# EAGLE board Low.Noise.Current.Source (EAGLE 7.2.0)
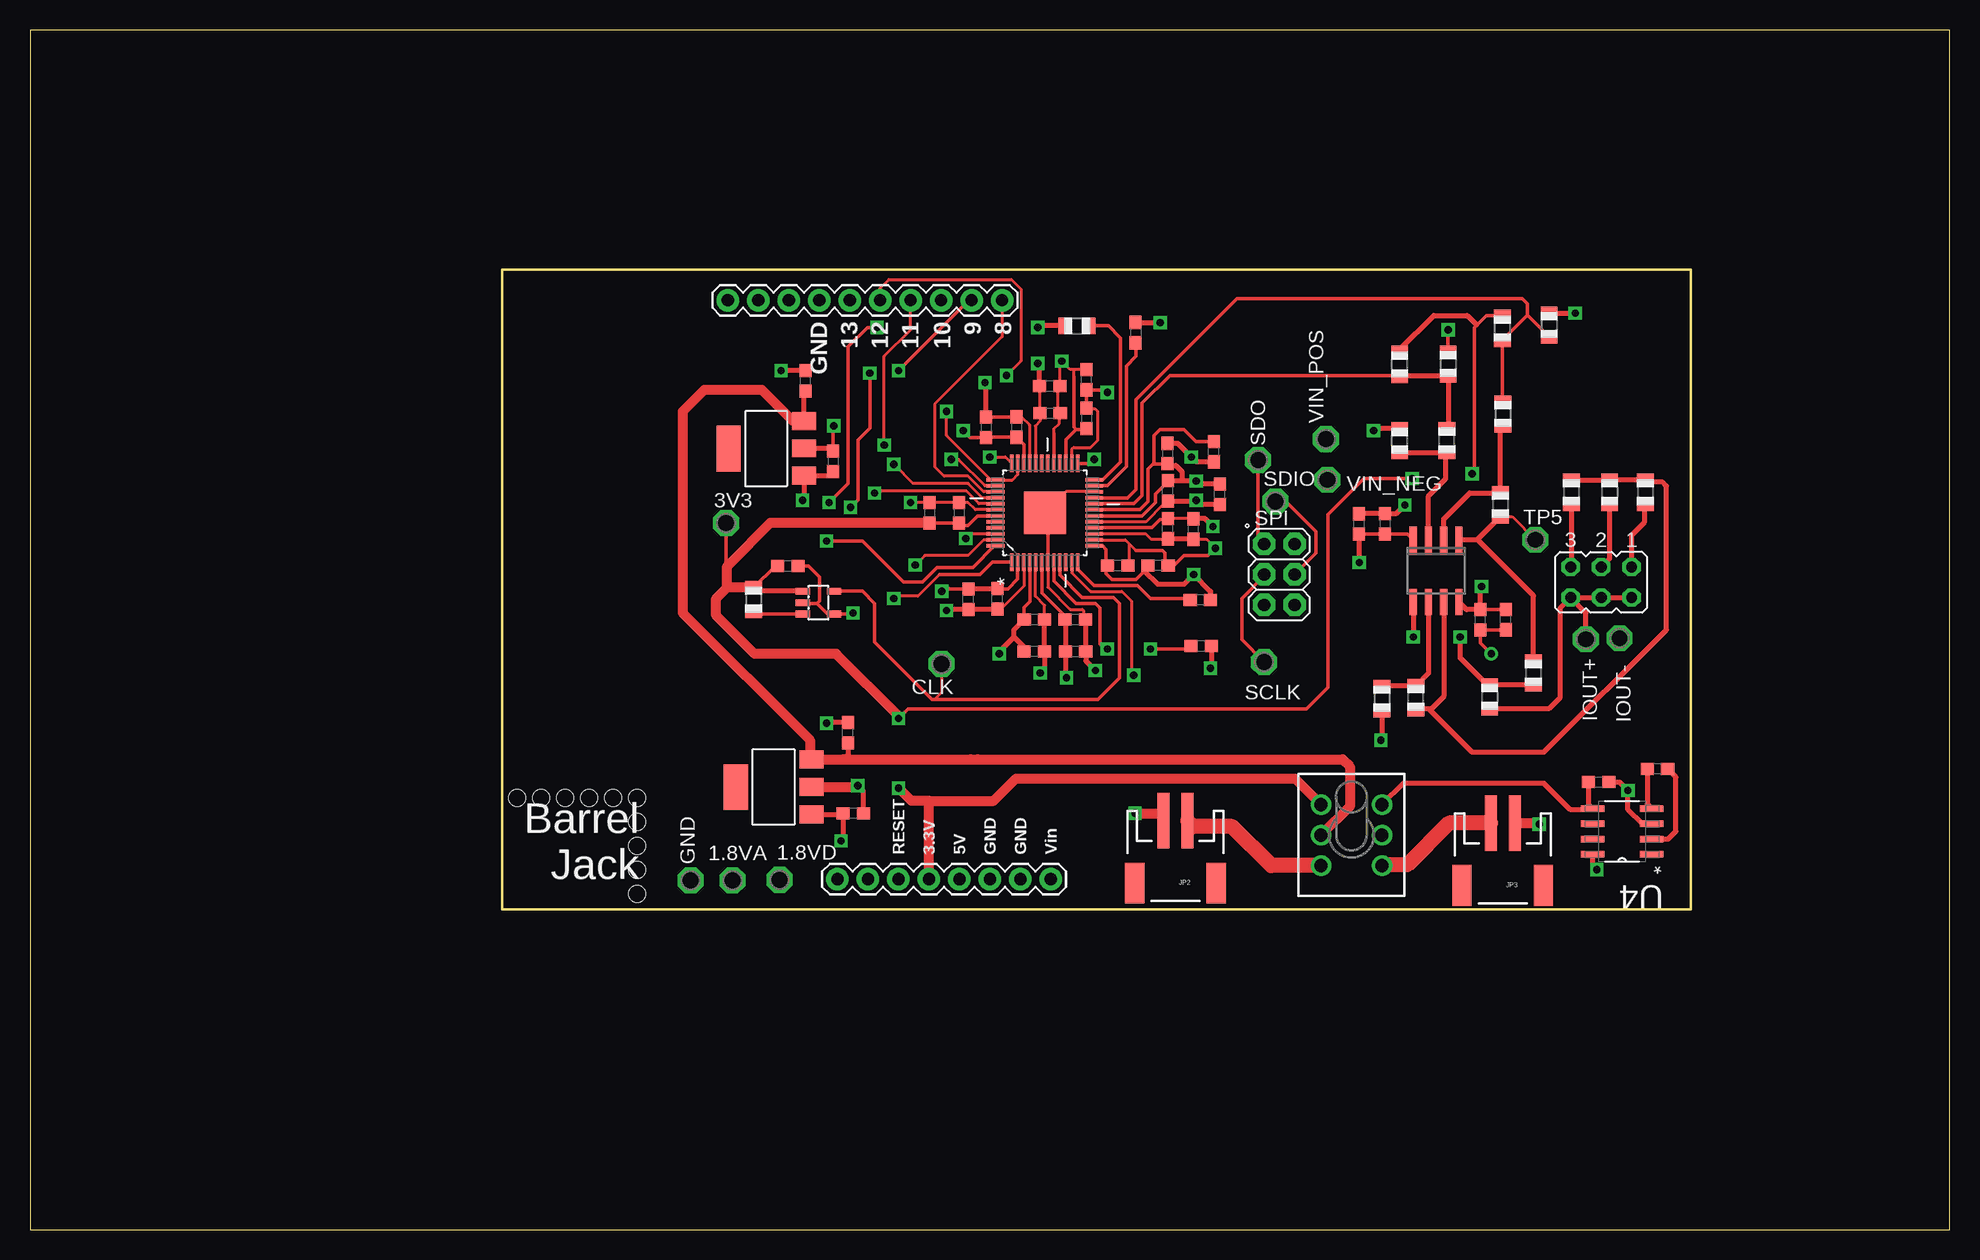
[diagram p0: board, top side]
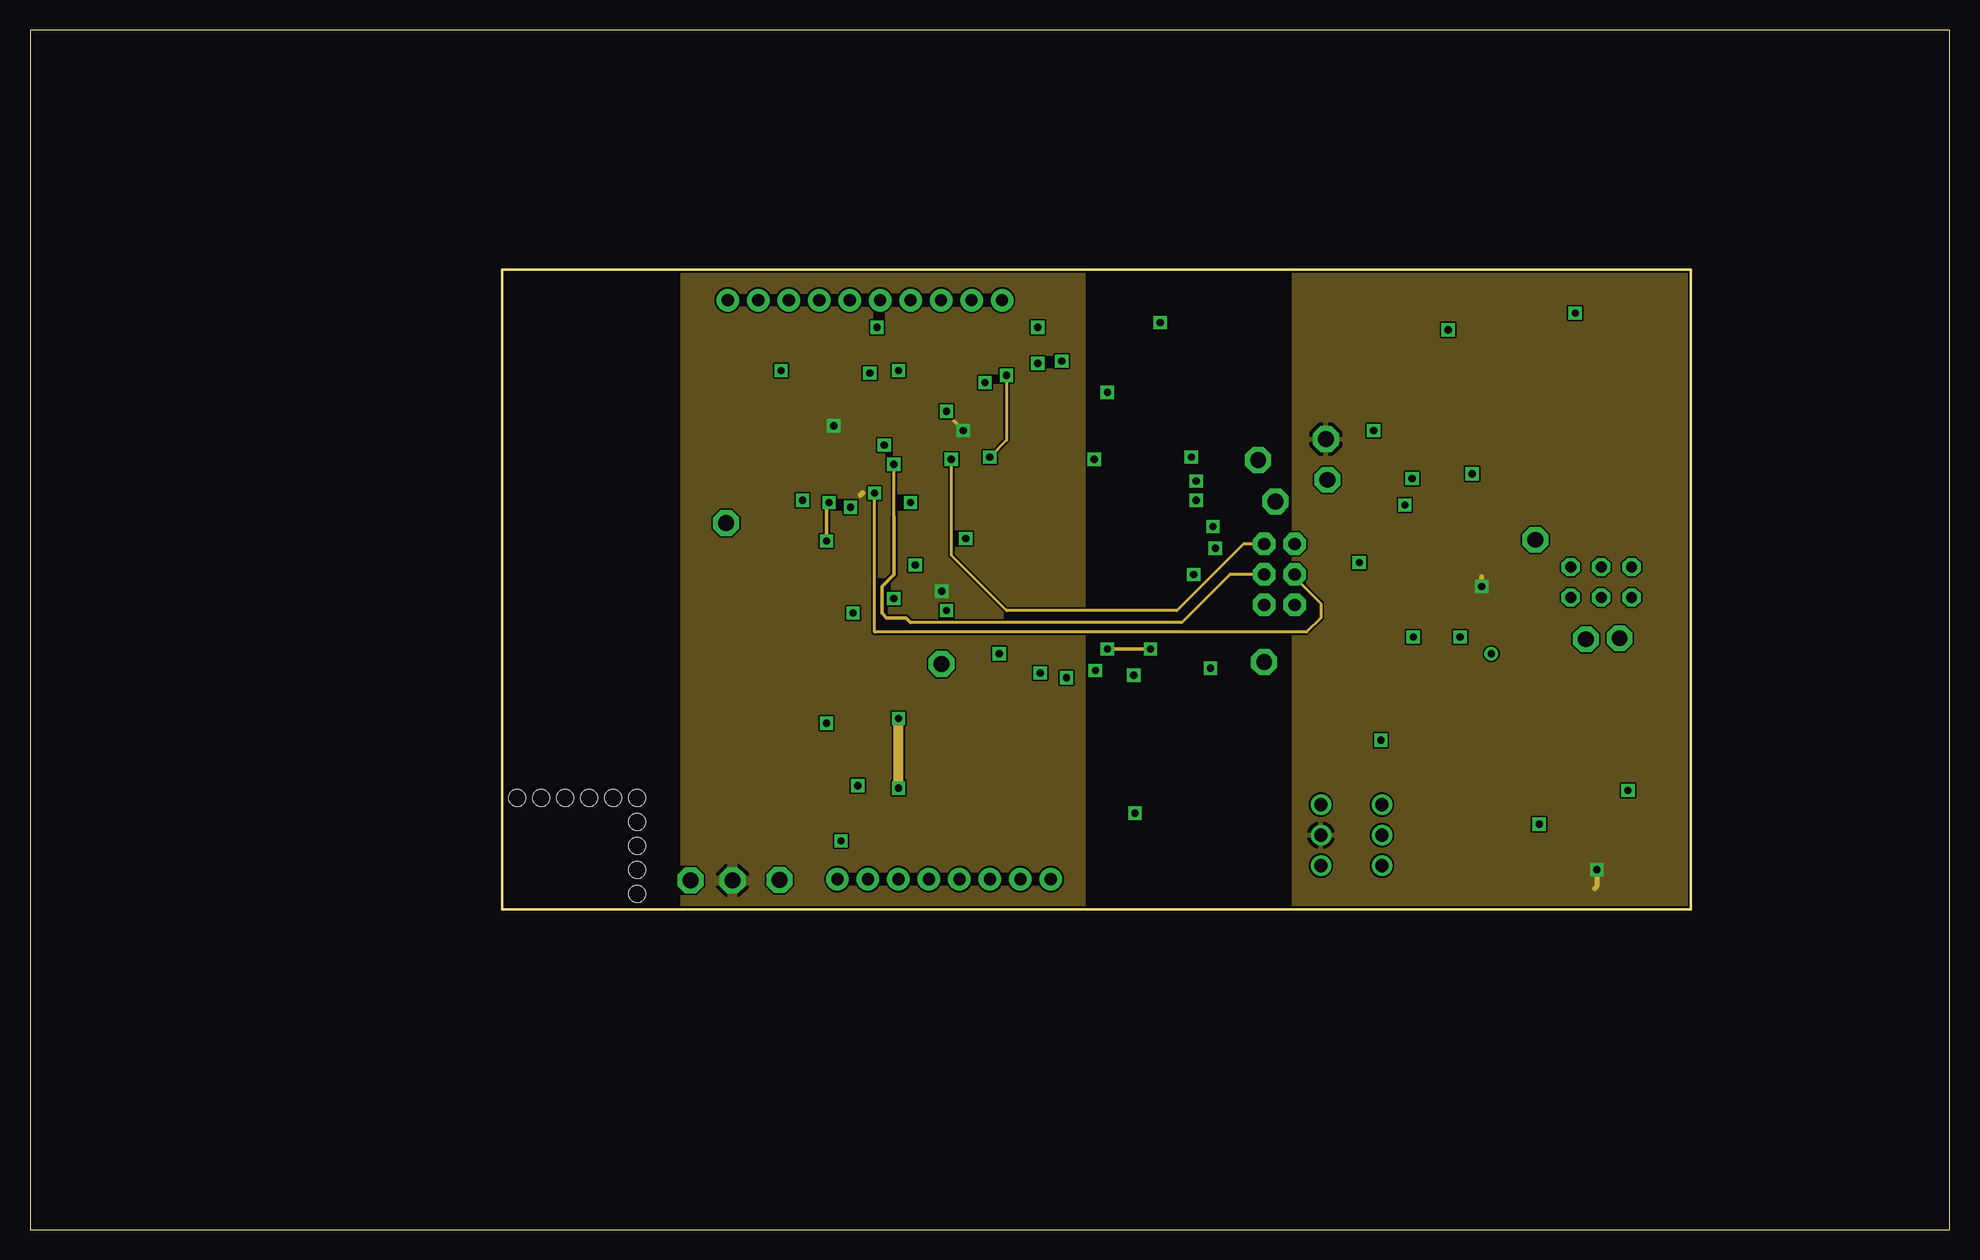
[diagram p1: board, inner layer VDD]
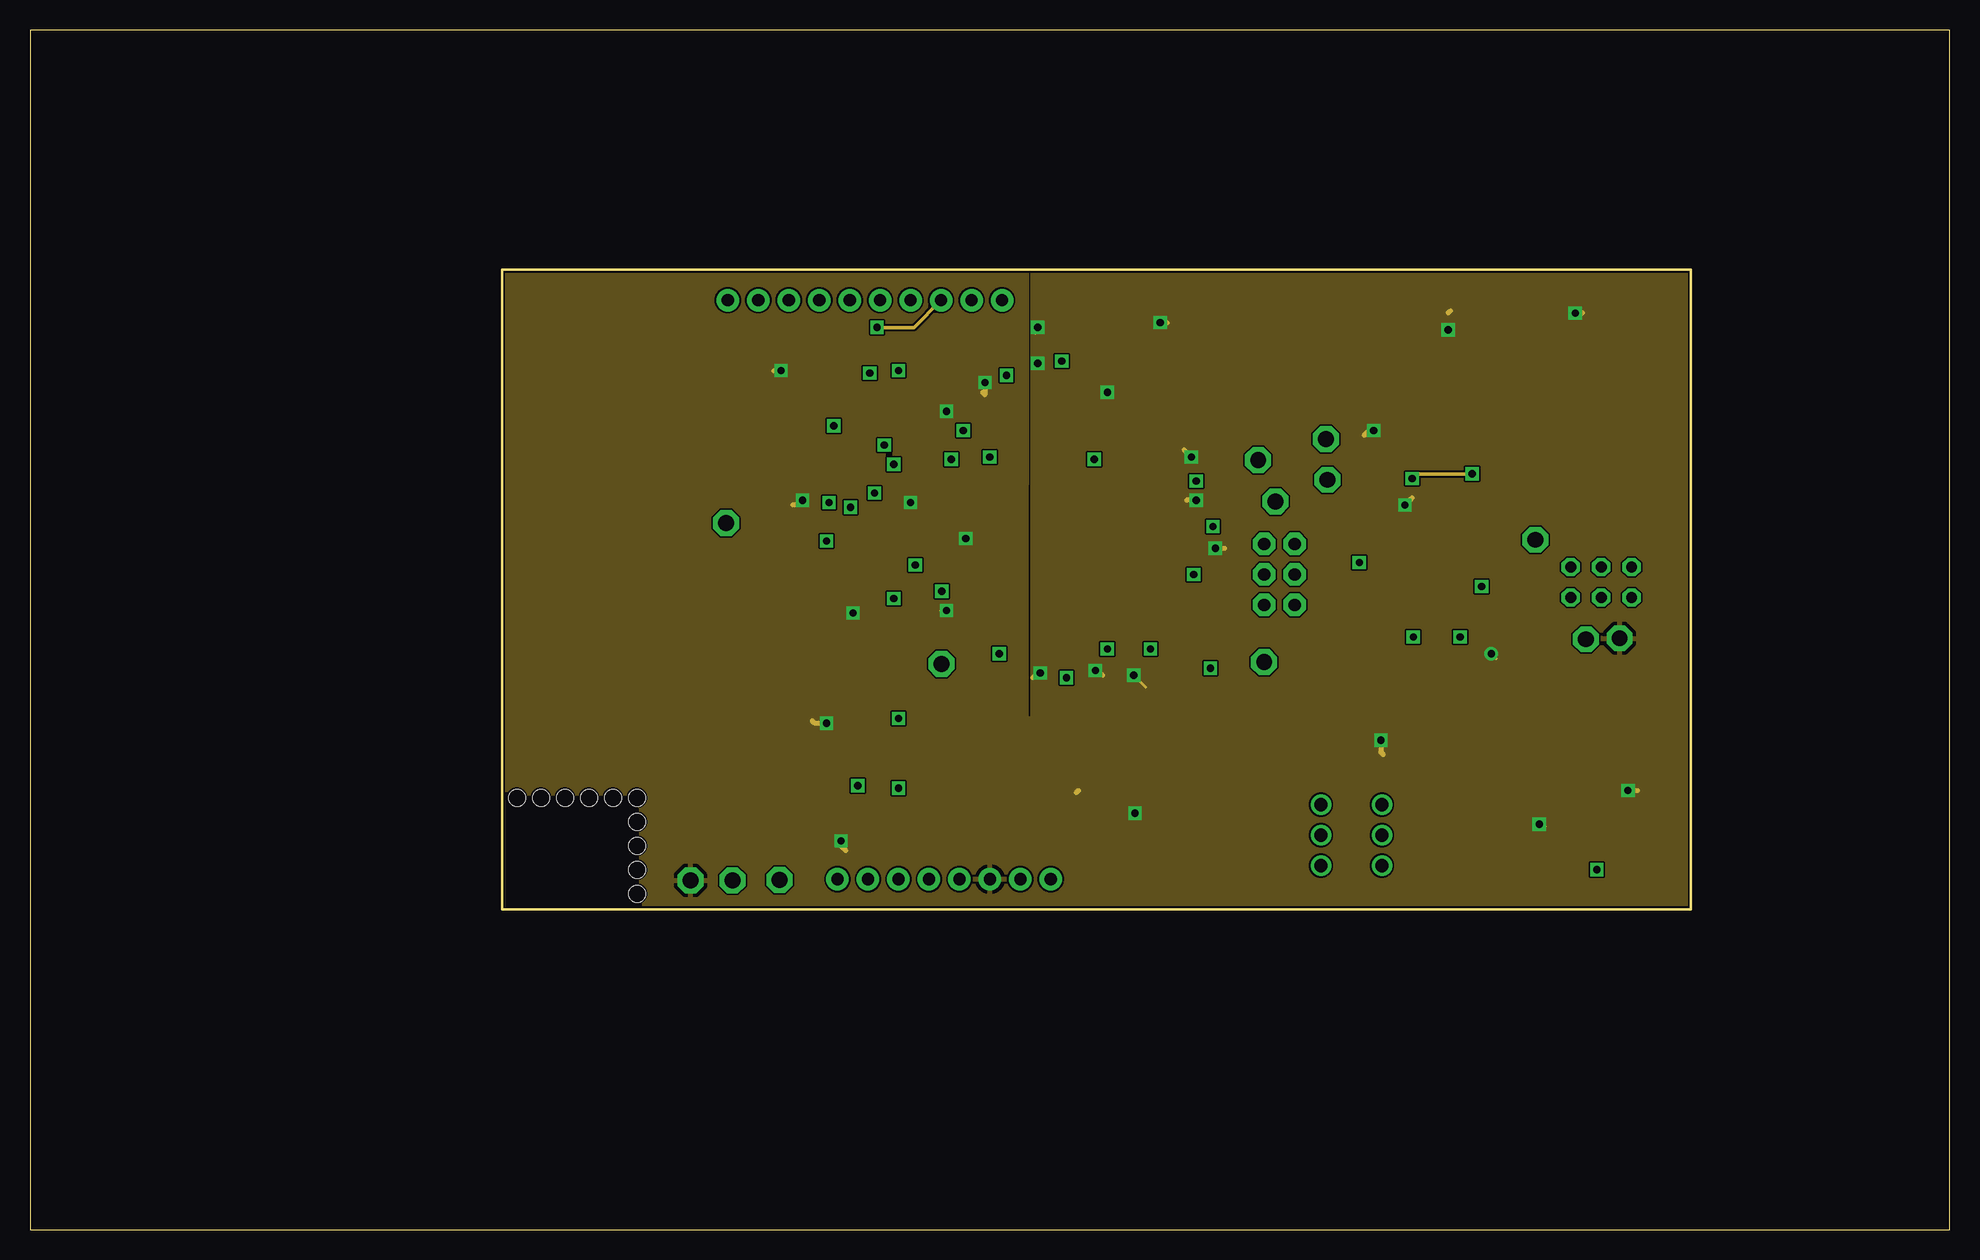
[diagram p2: board, inner layer GND]
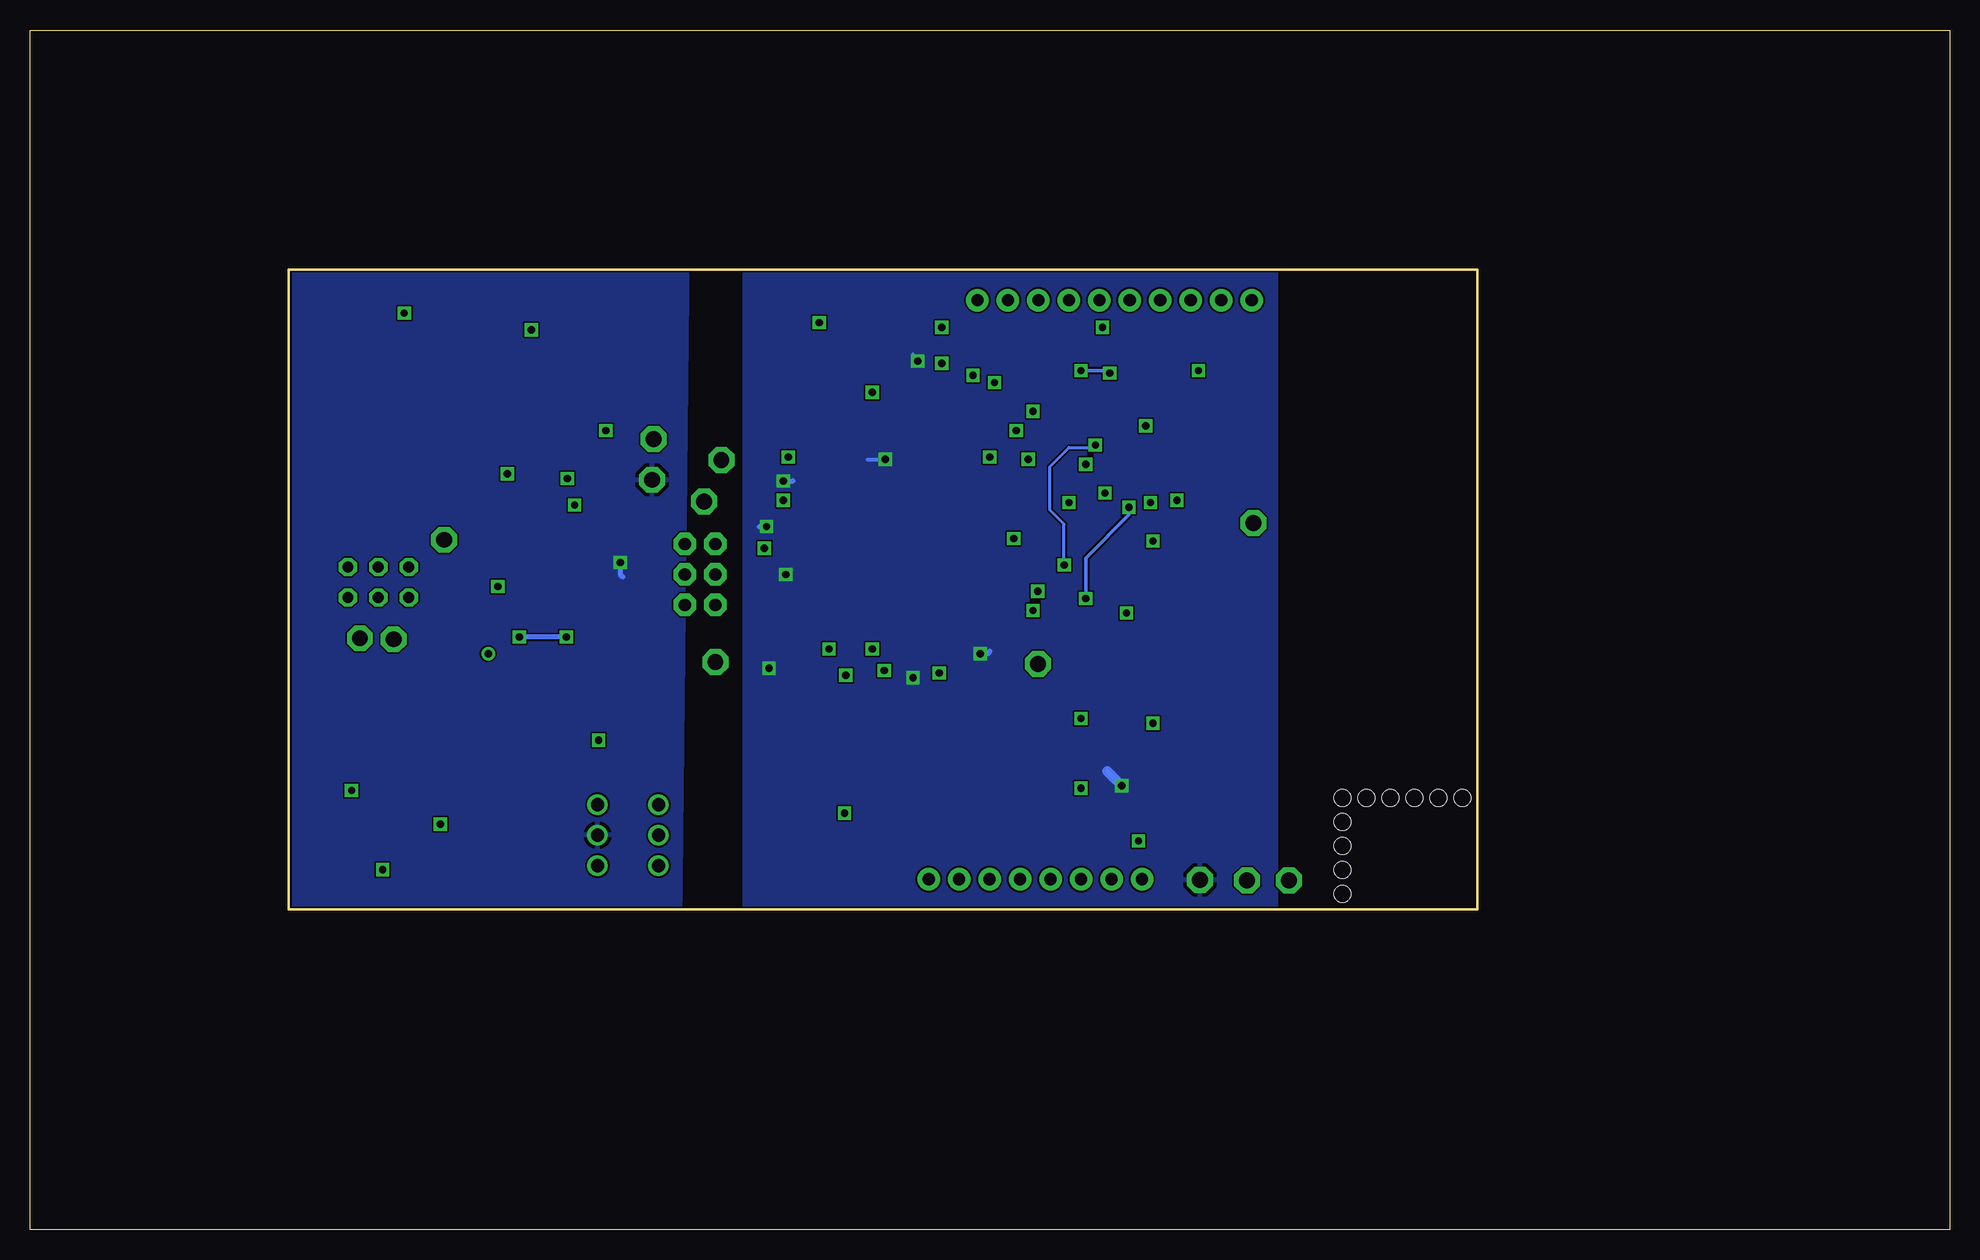
[diagram p3: board, bottom side, seen from below]

Size 160 x 100 mm. Coordinates in mm from the lower left corner, seen from the top.
Outline: 0,0 160,0 160,100 0,100 0,0
Copper layers (1*2*15*16): Top 0.035mm / dielectric 1.5mm / VDD 0.035mm / dielectric 0.15mm / GND 0.035mm / dielectric 0.2mm / Bottom 0.035mm
Design rules "SparkFun-4-layer": minimum track width 6mil, minimum drill 13mil, track to track 6mil, track to pad 6mil, pad to pad 6mil, via to via 6mil, smd to smd 6mil, copper to edge 6mil, drill to drill 8mil, minimum pad ring 12mil, minimum via ring 10mil, stop-mask expansion 4mil, vias tented up to drill 20mil, thermal gap 12mil
Holes 1.4 mm at 40.6,36 42.6,36 44.6,36 46.6,36 48.6,36 50.6,36 50.6,34 50.6,32 50.6,30 50.6,28

## Footprints (pad centres in the part's own frame; a part is rotated, then mirrored left to right if it is on the bottom)
P1-13 = drill 1.321 pad 2.159 octagon: TP 0,0
C0603 = smd 1.1 x 1: 1 -0.85,0; 2 0.85,0
SOT223 = smd 1.499 x 2.007: 1 -2.261,-3.15; 2 0.025,-3.15; 3 2.311,-3.15 | smd 3.81 x 2.007: 4 0,3.15
JP3Q = drill 0.914 octagon: 1 -2.54,-1.27; 2 -2.54,1.27; 3 0,-1.27; 4 0,1.27; 5 2.54,-1.27; 6 2.54,1.27
JST-2-SMD = smd 1 x 4.6: 1 -1,-3.7; 2 1,-3.7 | smd 1.6 x 3.4: NC1 -3.4,1.5; NC2 3.4,1.5
SO8 = smd 0.6 x 2.2: 1 -1.905,-2.6; 2 -0.635,-2.6; 3 0.635,-2.6; 4 1.905,-2.6; 5 1.905,2.6; 6 0.635,2.6; 7 -0.635,2.6; 8 -1.905,2.6
ARDUINO_DUE = drill 1.016 pad 1.88: 3.3V 35.56,2.54; 5V 38.1,2.54; 8 41.656,50.8; 9 39.116,50.8; 10 36.576,50.8; 11 34.036,50.8; 12 31.496,50.8; 13 28.956,50.8; AREF 23.876,50.8; GND 26.416,50.8; GND. 43.18,2.54; GND.. 40.64,2.54; I/OREF 30.48,2.54; N/C 27.94,2.54; RESET 33.02,2.54; SCL1 18.796,50.8; SDA1 21.336,50.8; VIN 45.72,2.54 | drill 1.016 pad 1.88 octagon: +5V_ 66.04,30.48; GND__ 66.04,25.4; MISO 63.5,30.48; MOSI 66.04,27.94; RESET. 63.5,25.4; SCK 63.5,27.94
R0805 = smd 1.1 x 1.4: 1 -1,0; 2 1,0
TL4XPO = drill 1.1 pad 1.676: 1 -2.54,2.54; 2 0,2.54; 3 2.54,2.54; 4 -2.54,-2.54; 5 0,-2.54; 6 2.54,-2.54
QFP50P900X900X120-49N = smd 1.473 x 0.279: 1 -4.115,2.743; 2 -4.115,2.261; 3 -4.115,1.753; 4 -4.115,1.245; 5 -4.115,0.762; 6 -4.115,0.254; 7 -4.115,-0.254; 8 -4.115,-0.762; 9 -4.115,-1.245; 10 -4.115,-1.753; 11 -4.115,-2.261; 12 -4.115,-2.743; 25 4.115,-2.743; 26 4.115,-2.261; 27 4.115,-1.753; 28 4.115,-1.245; 29 4.115,-0.762; 30 4.115,-0.254; 31 4.115,0.254; 32 4.115,0.762; 33 4.115,1.245; 34 4.115,1.753; 35 4.115,2.261; 36 4.115,2.743 | smd 0.279 x 1.473: 13 -2.743,-4.115; 14 -2.261,-4.115; 15 -1.753,-4.115; 16 -1.245,-4.115; 17 -0.762,-4.115; 18 -0.254,-4.115; 19 0.254,-4.115; 20 0.762,-4.115; 21 1.245,-4.115; 22 1.753,-4.115; 23 2.261,-4.115; 24 2.743,-4.115; 37 2.743,4.115; 38 2.261,4.115; 39 1.753,4.115; 40 1.245,4.115; 41 0.762,4.115; 42 0.254,4.115; 43 -0.254,4.115; 44 -0.762,4.115; 45 -1.245,4.115; 46 -1.753,4.115; 47 -2.261,4.115; 48 -2.743,4.115 | smd 3.505 x 3.505: 49 0,0
SOT23-5L = smd 0.55 x 1.2: 1 -0.95,-1.3; 2 0,-1.3; 3 0.95,-1.3; 4 0.95,1.3; 5 -0.95,1.3
SOIC127P600X175-8N = smd 1.981 x 0.533: 1 -2.464,1.905; 2 -2.464,0.635; 3 -2.464,-0.635; 4 -2.464,-1.905; 5 2.464,-1.905; 6 2.464,-0.635; 7 2.464,0.635; 8 2.464,1.905

## Placement (x,y rotation side)
1.8VA  PTR1PAD1-13  [P1-13]  58.55,29.1 0 top
1.8VD  PTR1PAD1-13  [P1-13]  62.47,29.15 0 top
3V3  PTR1PAD1-13  [P1-13]  58.03,58.9 0 top
C1  0.1uF  [C0603]  97.62,48.64 180 top
C2  0.1uF  [C0603]  92.16,74.77 270 top
C3  10uF  [C0603]  66.94,64.05 270 top
C4  0.1uF  [C0603]  64.65,70.75 90 top
C5  10uF  [C0603]  68.62,34.69 180 top
C6  0.1uF  [C0603]  68.17,41.41 90 top
C7  0.1uF  [C0603]  87.12,50.84 180 top
C8  0.1uF  [C0603]  94.84,58.43 90 top
C9  0.1uF  [C0603]  94.84,61.58 90 top
C10  0.1uF  [C0603]  90.67,55.34 180 top
C11  0.1uF  [C0603]  88.06,67.62 270 top
C12  0.1uF  [C0603]  85.03,68.06 0 top
C13  0.1uF  [C0603]  83.72,50.84 180 top
C15  10uF  [C0603]  96.98,58.4 90 top
C16  10uF  [C0603]  98.68,64.85 90 top
C17  10uF  [C0603]  85,70.32 0 top
C18  10uF  [C0603]  88.08,70.85 90 top
C19  10uF  [C0603]  99.18,61.3 90 top
C20  10uF  [C0603]  87.15,48.18 180 top
C21  10uF  [C0603]  94.03,55.37 180 top
C23  0.1uF  [C0603]  80.63,52.58 90 top
C24  10uF  [C0603]  78.22,52.55 90 top
C25  0.1uF  [C0603]  82.22,66.9 270 top
C26  10uF  [C0603]  79.67,66.88 270 top
C27  0.1uF  [C0603]  77.43,59.75 270 top
C28  10uF  [C0603]  74.97,59.75 270 top
C29  0.1uF  [C0603]  63.17,55.32 0 top
C30  0.1uF  [C0603]  97.55,52.48 180 top
C31  0.1uF  [C0603]  120.91,50.83 90 top
C32  10uF  [C0603]  135.65,38.41 180 top
C33  10uF  [C0603]  130.75,37.31 0 top
C34  10uF  [C0603]  83.7,48.2 180 top
C35  10uF  [C0603]  123,50.85 90 top
C36  0.1uF  [C0603]  112.94,58.84 270 top
C37  10uF  [C0603]  110.75,58.82 270 top
C38  0.1uF  [C0603]  94.8,64.7 270 top
CLK  PTR1PAD1-13  [P1-13]  75.97,47.16 180 top
GND  PTR1PAD1-13  [P1-13]  55.07,29.1 0 top
IC1  REG1117  [SOT223]  61.37,65.1 90 top
IC2  REG1117  [SOT223]  61.98,36.88 90 top
IOUT+  PTR1PAD1-13  [P1-13]  129.7,49.21 270 top
IOUT-  PTR1PAD1-13  [P1-13]  132.5,49.29 270 top
JP1  [JP3Q]  130.96,53.96 180 top
JP2  [JST-2-SMD]  95.48,30.38 180 top
JP3  [JST-2-SMD]  122.75,30.18 180 top
OP1  RC4560S08-RC4560  [SO8]  117.2,54.91 180 top
PCB1  ARDUINO_DUE  [ARDUINO_DUE]  39.37,26.67 0 top
R1_0.1%  100K  [R0805]  125.32,46.4 270 top
R1_DAC_1%  931  [R0805]  118.21,72.15 270 top
R2_0.1%  100K  [R0805]  121.67,44.4 270 top
R2_DAC_1%  1500  [R0805]  118.11,65.78 90 top
R3  10k  [R0805]  60.32,52.51 270 top
R3_DAC_1%  750  [R0805]  114.16,65.76 90 top
R4_DAC_1%  1150  [R0805]  126.63,75.4 270 top
R6_0.1%  100K  [R0805]  115.51,44.33 90 top
R7_0.1%  100K  [R0805]  112.69,44.25 270 top
R_GAIN1_0.1%  2k  [R0805]  134.64,61.46 270 top
R_GAIN2_0.1%  5k  [R0805]  131.66,61.46 270 top
R_GAIN3_0.1%  10k  [R0805]  128.48,61.46 270 top
R_SET1_0.1%  7.87k  [R0805]  87.28,75.34 0 top
RF_DAC_1%  750  [R0805]  122.56,60.42 270 top
RG_DAC_1%  1500  [R0805]  122.76,67.98 270 top
RX_DAC_1%  287  [R0805]  114.16,72.12 90 top
RY_DAC_1%  309  [R0805]  122.74,75.12 90 top
S3  TL42PO  [TL4XPO]  110.15,32.88 270 top
SCLK  PTR1PAD1-13  [P1-13]  102.87,47.3 0 top
SDIO  PTR1PAD1-13  [P1-13]  103.82,60.7 0 top
SDO  PTR1PAD1-13  [P1-13]  102.37,64.15 0 top
TP5  PTR1PAD1-13  [P1-13]  125.47,57.5 0 top
U1  AD9954YSVZ  [QFP50P900X900X120-49N]  84.59,59.75 90 top
U2  LTC69000  [SOT23-5L]  65.72,52.26 270 top
U4  LTC1044CS8PBF  [SOIC127P600X175-8N]  132.71,33.19 180 top
VIN_NEG  PTR1PAD1-13  [P1-13]  108.15,62.5 0 top
VIN_POS  PTR1PAD1-13  [P1-13]  108.03,65.9 0 top

## Library data of the parts
1.8VA 1.8VD 3V3 CLK GND IOUT+ IOUT- SCLK SDIO SDO TP5 VIN_NEG VIN_POS = testpad
C1-C13 C15-C21 C23-C38 = resistor
IC1 IC2 = burr-brown; MPN: REG1117; OC_FARNELL: 1097566; OC_NEWARK: 14P6981
JP1 = jumper
JP2 JP3 = SwitchBoard
OP1 = RC4560
PCB1 = Due_for_AD9954_CS
R1_0.1% R1_DAC_1% R2_0.1% R2_DAC_1% R3 R3_DAC_1% R4_DAC_1% R6_0.1% R7_0.1% R_GAIN1_0.1% R_GAIN2_0.1% R_GAIN3_0.1% R_SET1_0.1% RF_DAC_1% RG_DAC_1% RX_DAC_1% RY_DAC_1% = adafruit
S3 = switch
U1 = AD9954; MPN: AD9954YSVZ; OC_FARNELL: 1581969; OC_NEWARK: 19M8953; PACKAGE: TQFP-48; SUPPLIER: ANALOG DEVICES
U2 = LTC6900
U4 = LTC_By_element14_Batch_1; MPN: LTC1044CS8#PBF; OC_FARNELL: 1663593; OC_NEWARK: 55M8900; PACKAGE: SOIC-8; SUPPLIER: Linear Technology

## Nets
1V8_ANALOG: 1.8VD.TP C1.1 C5.1 C7.2 C8.2 C9.2 C10.2 C11.2 C12.2 C13.2 C15.2 C16.2 C17.2 C18.2 C19.2 C20.2 C21.2 C30.1 C34.2 C38.2 IC2.2 U1.4 U1.6 U1.13 U1.16 U1.18 U1.19 U1.25 U1.27 U1.29
1V8_DIGITAL: 1.8VA.TP C3.1 C23.2 C24.2 C25.2 C26.2 IC1.2 U1.2 U1.34
3V3: 3V3.TP C27.2 C28.2 C29.1 PCB1.3.3V R3.1 RX_DAC_1%.2 RY_DAC_1%.2 S3.4 U1.43 U2.1
-3V3: C33.1 S3.1 U4.5
DAC_VOUT: OP1.1 R1_0.1%.1 RF_DAC_1%.2 TP5.TP
GND: C2.1 C3.2 C4.2 C5.2 C6.2 C7.1 C8.1 C9.1 C10.1 C11.1 C12.1 C13.1 C15.1 C16.1 C17.1 C18.1 C19.1 C20.1 C21.1 C23.1 C24.1 C25.1 C26.1 C27.1 C28.1 C29.2 C31.1 C33.2 C34.1 C35.1 C36.1 C37.1 C38.1 GND.TP IC1.1 IC2.1 IOUT-.TP JP2.2 JP3.1 PCB1.GND.. R1_DAC_1%.1 R3_DAC_1%.2 R4_DAC_1%.1 R7_0.1%.2 R_SET1_0.1%.1 U1.3 U1.5 U1.7 U1.11 U1.14 U1.15 U1.17 U1.22 U1.26 U1.32 U1.33 U1.35 U1.37 U1.42 U1.46 U1.49 U2.2 U2.4 U4.3
I/O_UPDATE: PCB1.9 U1.1
IOUT: R4_DAC_1%.2 RG_DAC_1%.1 RY_DAC_1%.1 U1.21
N$1: C2.2 U1.23
N$2: C1.2 U1.8
N$4: R_SET1_0.1%.2 U1.24
N$5: OP1.3 R2_DAC_1%.1 R3_DAC_1%.1
N$6: OP1.5 R1_0.1%.2 R2_0.1%.1
N$7: OP1.2 RF_DAC_1%.1 RG_DAC_1%.2
N$8: OP1.6 R6_0.1%.2 R7_0.1%.1
N$9: OP1.7 R6_0.1%.1 R_GAIN1_0.1%.1 R_GAIN2_0.1%.1 R_GAIN3_0.1%.1
N$10: C30.2 U1.12
N$11: IOUT+.TP JP1.2 JP1.4 JP1.6 R2_0.1%.2
N$12: C32.1 U4.2
N$13: R3.2 U2.3
N$14: C32.2 U4.4
N$18: JP1.3 R_GAIN2_0.1%.2
N$20: JP1.5 R_GAIN3_0.1%.2
N$21: JP1.1 R_GAIN1_0.1%.2
PS0: PCB1.11 U1.47
PS1: PCB1.10 U1.48
REFCLK: CLK.TP U1.9 U2.5
RESET: PCB1.12 U1.36
SCLK: PCB1.SCK SCLK.TP U1.40
SDIO: PCB1.MOSI SDIO.TP U1.41
SDO: PCB1.MISO SDO.TP U1.38
VBAT+: JP2.1 S3.6
VBAT-: JP3.2 S3.3
VIN_NEG: C36.2 C37.2 OP1.4 S3.2 VIN_NEG.TP
VIN_POS: C4.1 C6.1 C31.2 C35.2 IC1.3 IC2.3 OP1.8 S3.5 U4.8 VIN_POS.TP
~CS: PCB1.8 U1.39
~IOUT: R1_DAC_1%.2 R2_DAC_1%.2 RX_DAC_1%.1 U1.20

## Tracks (layer width: path | path; a pad name or v marks a point on that pad's centre or on a via)
1V8_ANALOG  (via drill 0.6, 0.6 pad 0.25)
  Top 0.254: 85.7,67.88 85.7,70.17 C17.2 85.85,72.25 v86,72.4 86.7,71.7 87,71.7 | 85.35,66.35 85.35,66.75 85.8,67.2 85.8,67.98 C12.2 | 87.6,71.7 87,71.7 | 87,71.1 87,71.7 | 96.95,59.28 C8.2 94.64,59.28
  Top 0.305: U1.4 83.34,52.34 82.87,51.87 C13.2 82.85,50.82 | U1.6 84.34,53.06 86.27,51.13 C7.2 86.3,50.81 | U1.29 85.35,66.35 | 85.7,67.88 C12.2 85.85,68.09 | U1.27 86.34,65.84 87.2,66.7 | U1.13 89.39,57.01 89.7,56.7 89.7,55.46 C10.2 89.7,55.22 89.7,54.7 90.2,54.2 92.2,54.2 92.9,54.9 93.18,55.18 C21.2 | U1.19 92.5,60 93.2,60.7 93.2,63.4 93.6,63.8 93.8,63.8 | 94.65,63.7 C38.2 94.75,63.8 93.8,63.8 | U1.16 93.5,58.51 94.2,59.2 94.76,59.2 C8.2 | C9.2 94.84,62.34 93.8,61.3 93.8,60.6 92.7,59.5 U1.18 | 96.95,59.28 C15.2 | C16.2 97.2,65.7 96.2,66.7 94.2,66.7 93.7,66.2 93.7,63.9 93.8,63.8 | U1.25 88.36,63.87 v88.7,64.2 | 87.2,66.7 87.99,66.7 C11.2 | C18.2 87.6,71.7 | 87,71.1 87,66.9 87.2,66.7
  Top 0.406: C5.1 69.47,36.53 v69,37 | v80.8,48 81,48.2 81,48.4 82,49.4 | 86.3,50.81 C20.2 86.3,46.1 v86.4,46 | 82,49.4 82,49.97 C13.2 | C34.2 82.85,48.55 82,49.4 | v98.6,58.6 97.92,59.28 97.01,59.28 C15.2 | C19.2 97.45,62.15 v97.2,62.4 97.17,62.43 96,62.43 | C9.2 96,62.43 | 98.4,53 C30.1 98.4,53.2 v97,54.6 96.2,53.8 94,53.8 92.9,54.9 | C1.1 98.47,46.87 v98.4,46.8 | 94.65,63.7 95.5,63.7 96,63.2 96,62.43
  Top 0.813: IC2.2 68.91,36.91 v69,37
  Bottom 0.254: v86,72.4 86,72.6 86.4,73
  Bottom 0.305: v88.7,64.2 90.2,64.2
  Bottom 0.406: v80.8,48 80.2,48 80,48.2 | v86.4,46 86.4,45.6 86.2,45.8 | v98.6,58.6 99.2,58.6 | v97.2,62.4 96.4,62.4 | v98.4,46.8 98.4,46.4 | v97,54.6 96.6,55
  Bottom 0.813: v69,37 70.2,38.2
  pour Bottom: 56.2,81.6 56.2,24.2 54.2,22.2 98.4,22.2 100.4,24.2 100.4,83 100.2,83.2 57,83.2 56.2,82.4
1V8_DIGITAL  (via drill 0.6 pad 0.25)
  Top 0.305: U1.2 82.33,54.23 81.5,53.4 80.66,53.4 C23.2 | 78.25,53.43 C24.2 76.6,53.4 | U1.34 82.84,65.43 C25.2 79.69,66.05 C26.2 78.37,66.03 v77.8,66.6 | v67,67 66.94,66.94 C3.1 66.94,64.98 66.8,65.12 | v76,53.2 76.23,53.43 76.57,53.43 76.6,53.4 | 76.6,53.4 76.6,53.43
  Top 0.406: IC1.2 66.8,65.12 67.11,65.12 | 78.25,53.43 C23.2
  VDD 0.305: v77.8,66.6 77,67.4 | v76,53.2 75.6,52.8
  VDD 0.406: 69.4,61.4 69.2,61.2
  pour VDD: 54.6,82.2 54.6,24 57.4,21.2 87.4,21.2 87.6,21.4 87.6,84 87,84.6 55.2,84.6
3V3  (via drill 0.6 pad 0.25)
  Top 0.305: U1.43 79,59.5 78.2,58.7 77.63,58.7 C27.2 C28.2 | C29.1 62.13,55.32 R3.1 | 122.66,76.2 121.4,76.2 120.6,75.4 120.4,75.2 120.4,63.2 v120.2,63 | v115.2,62.6 111.2,62.6 108.2,59.6 108.2,45.2 106.4,43.4 73.2,43.4 v72.4,42.6 | 3V3.TP 58.03,55.77 58.3,55.5
  Top 0.406: U2.1 60.8,53.21 | 60.8,53.21 60.62,53.21 R3.1 | 60.61,53.4 60.8,53.21 | RX_DAC_1%.2 114.16,73.36 117,76.2 119.8,76.2 120.6,75.4 | 122.66,76.2 RY_DAC_1%.2
  Top 0.813: PCB1.3.3V 74.93,35.73 | 74.93,35.73 73.47,35.73 v72.4,36.8 | S3.4 105.43,37.6 82.2,37.6 80.33,35.73 74.93,35.73 | v72.4,42.6 72.4,42.8 67.2,48 60.4,48 57.2,51.2 57.2,52.6 58.11,53.51 | R3.1 58.11,53.51 | C28.2 61.7,58.9 58.3,55.5 58.11,55.31 58.11,53.51
  VDD 0.813: v72.4,36.8 v72.4,42.6
  GND 0.305: v120.2,63 115.6,63 v115.2,62.6
-3V3
  Top 0.406: C33.1 129.9,35.44 U4.5 129.9,35.09 129.8,35 128.4,35 126.2,37.2 114.47,37.2 S3.1
DAC_VOUT
  Top 0.254: RF_DAC_1%.2 123.55,59.42 TP5.TP
  Top 0.406: OP1.1 120.65,57.51 | 120.65,57.51 RF_DAC_1%.2 | R1_0.1%.1 125.32,52.84 120.65,57.51
GND  (via drill 0.6, 0.6 pad 0.25)
  Top 0.254: U1.3 82.84,53.64 80.93,51.73 C23.1 80.6,51.7 | U1.42 78.8,60 78.2,60.6 C27.1 C28.1 v73.4,60.6 | 88,50.81 C7.1 | C7.1 87.56,50.84 | C13.1 84.57,52.03 83.8,52.8 83.8,55.61 U1.5 | 82.2,67.73 C25.1 82.65,67.75 83.3,67.1 83.3,63.91 U1.33 | U1.32 83.8,63.89 83.8,67 84.18,67.38 C12.1 84.15,68.09 C17.1 | U1.26 86.85,65.05 87,65.2 88.4,65.2 89,65.8 89,68.2 88.8,68.4 88.13,68.4 C11.1 | U1.15 93,58 93.42,57.58 C8.1 94.87,57.55 | U1.14 91.31,57.49 91.6,57.2 | 91.6,57.2 91.6,55.42 C10.1 | C21.1 94.88,55.72 | 92.2,56.6 91.6,57.2 | C9.1 95.12,60.45 94.45,60.45 93,59 88.72,59 U1.17 | U1.7 84.84,53.56 86.7,51.7 87.7,51.7 87.8,51.6 87.8,51.01 C7.1 | U1.46 78.4,58 v78,57.6 | v76.4,68.2 76.4,66.2 80.11,62.49 U1.37 81.89,62.49 82.33,62.93 U1.35 | C15.1 98.05,57.55 v98.8,56.8 | U1.22 86.34,61.5 U1.49 | U1.11 86.85,54.75 88.4,53.2 91,53.2 91.8,52.4 91.8,46.4 v92,46.2
  Top 0.305: 65.6,52.2 66.49,51.31 U2.4 68.51,51.31 v68.6,51.4 | 65.6,52.2 64.48,52.2 U2.2 | C29.2 64.88,55.32 65.8,54.4 65.8,52.4 65.6,52.2 | v118.2,75 R1_DAC_1%.1 | v121.8,48 120.91,48.89 C31.1 120.93,50 C35.1 | 79.69,67.75 C25.1 | U1.7 84.84,59.76 U1.49 | v89.8,69.8 89.6,70 C18.1 88.08,68.49 C11.1 | v98.8,56.8 98.2,56.2 96.2,56.2 95.37,55.37 C21.1 94.6,55.65 94.6,56.4 94.4,56.6 92.2,56.6 | C3.2 66.94,62.98 66.8,62.84
  Top 0.406: R4_DAC_1%.1 v128.8,76.4 | R3_DAC_1%.2 112.16,66.76 v112,66.6 | U4.3 134.38,33.83 133.2,35 v133.2,36.6 132.49,37.31 C33.2 | v64.4,60.8 64.52,60.92 IC1.1 66.8,62.84 66.98,62.84 | R7_0.1%.2 112.69,40.89 v112.6,40.8 | C6.2 66.46,42.26 v66.4,42.2 | IC2.1 67.7,34.62 C5.2 67.77,32.57 v67.6,32.4 | C4.2 v62.6,71.6 | JP2.2 94.48,34.6 94.48,34.72 | R_SET1_0.1%.1 84.14,75.34 v84,75.2 | C17.1 84.15,72.05 v84,72.2 | 79.69,67.75 C26.1 79.67,70.53 v79.6,70.6 | v76.4,51.6 76.5,51.7 C24.1 80.6,51.7 | v84.2,46.4 84.55,46.75 C34.1 84.55,50.82 C13.1 | v88.8,46.6 88,47.4 C20.1 87.97,48.21 C7.1 | C15.1 94.87,57.55 | C19.1 97.55,60.45 v97.2,60.8 97.13,60.73 C9.1 | C16.1 97.2,64 v96.8,64.4 95.65,65.55 C38.1 | v114.6,60.4 113.89,59.69 C36.1 110.77,59.69 C37.1 | C2.1 94.18,75.62 v94.2,75.6
  Top 0.813: v92.1,34.7 94.38,34.7 94.48,34.6 | JP3.1 125.72,33.88 v125.8,33.8
  GND 0.254: v73.4,60.6 73,60.6 | v92,46.2 93,45.2
  GND 0.305: v68.6,51.4 69,51.8 | v121.8,48 122.2,47.6
  GND 0.406: v128.8,76.4 129.4,76.4 | v112,66.6 111.6,66.6 111.2,66.2 | 118.2,76.4 118.4,76.6 | v133.2,36.6 134,36.6 | v64.4,60.8 64.2,60.8 63.8,60.4 63.6,60.4 | v112.6,40.8 112.6,39.8 112.8,39.6 | v66.4,42.2 65.4,42.2 65.2,42.4 | 87.4,36.6 87.2,36.4 | v62.6,71.6 62,71.6 | v125.8,33.8 126,33.8 126.2,33.6 | v84,75.2 84,75 83.8,74.8 | v84,72.2 84.2,72.4 | v79.6,70.6 79.6,69.6 79.4,69.8 | v67.6,32.4 67.6,32 68,31.6 | v76.4,51.6 76,51.6 | v84.2,46.4 84,46.4 83.6,46 | v88.8,46.6 89,46.6 89.4,46.2 | v98.8,56.8 99.6,56.8 | v97.2,60.8 96.4,60.8 | v96.8,64.4 96.2,65 | v114.6,60.4 115.2,61 | v94.2,75.6 94.8,75.6
  pour GND: 35.56,82.55 83.05,81.55 83,42.6 83.6,42.6 83.6,81.6 83.2,82 83.8,82.8 143.51,82.55 143.51,21.59 36.56,21.79
I/O_UPDATE  (via drill 0.6 pad 0.25)
  Top 0.254: 75.8,54.6 74,52.8 72.2,52.8 v72,52.6
  Top 0.305: U1.1 80.23,55.63 79.2,54.6 75.8,54.6 | PCB1.9 78.27,77.47 v72.4,71.6 | v70,71.4 70,66.8 69,65.8 69,60.8 v68.4,60.2
  Bottom 0.305: v72.4,71.6 70.2,71.6 v70,71.4 | v68.4,60.2 68.4,59.6 72,56 v72,52.6
IOUT
  Top 0.305: U1.21 91.5,60.99 92.2,61.7 92.2,69.2 100.6,77.6 124.4,77.6 124.8,77.2 124.8,76.23 | 124.8,76.23 R4_DAC_1%.2 | RY_DAC_1%.1 122.74,69 | 123.02,74.4 123.02,74.45 124.8,76.23
  Top 0.406: 122.74,69 RG_DAC_1%.1 | 123.02,74.4 RY_DAC_1%.1
N$1
  Top 0.305: U1.23 89.81,62.01 91.4,63.6 91.4,72 92.2,72.8 92.2,73.88 C2.2
N$2  (via drill 0.6 pad 0.25)
  Top 0.305: U1.8 85.35,54.05 87.2,52.2 88.8,52.2 89.2,51.8 89.2,48.8 89.6,48.4 v89.8,48.4 | 96.73,48.6 C1.2 96.53,48.4 v93.4,48.4
  VDD 0.305: v89.8,48.4 v93.4,48.4
N$4
  Top 0.305: R_SET1_0.1%.2 89.88,75.34 90.9,74.32 90.9,64 89.39,62.49 U1.24
N$5
  Top 0.406: OP1.3 116.56,61.16 118,62.6 118,64.67 R2_DAC_1%.1 118.09,64.76 R3_DAC_1%.1
N$6  (via drill 0.6)
  Top 0.406: OP1.5 v115.3,49.41 v115.3,49.4 | v119.2,49.4 119.2,47.67 121.47,45.4 R2_0.1%.1 R1_0.1%.2
  Bottom 0.406: v115.3,49.4 v119.2,49.4
N$7
  Top 0.406: OP1.2 117.83,59.23 120,61.4 122.54,61.4 RF_DAC_1%.1 122.56,66.78 RG_DAC_1%.2
N$8
  Top 0.406: OP1.6 116.56,46.38 R6_0.1%.2 112.77,45.33 R7_0.1%.1
N$9
  Top 0.406: OP1.7 117.83,44.44 116.8,43.4 116.6,43.4 | 116.6,43.4 115.58,43.4 R6_0.1%.1 | 116.6,43.4 120.2,39.8 126.2,39.8 136.4,50 136.4,62 136.1,62.3 134.8,62.3 R_GAIN1_0.1%.1 R_GAIN2_0.1%.1 R_GAIN3_0.1%.1
N$10
  Top 0.305: U1.12 87.33,55.07 88.7,53.7 92.3,53.7 93.4,52.6 96.58,52.6 C30.2
N$11
  Top 0.406: JP1.6 127.53,51.8 127.53,44.33 126.6,43.4 R2_0.1%.2 | JP1.6 JP1.4 JP1.2 | IOUT+.TP 129.7,51.41 JP1.6
N$12
  Top 0.406: U4.2 136.56,32.55 137.2,33.2 137.2,37.71 C32.1
N$13
  Top 0.305: U2.3 60.52,51.31 R3.2
N$14
  Top 0.406: C32.2 134.8,35.47 U4.4
N$18
  Top 0.406: R_GAIN2_0.1%.2 131.66,55.93 JP1.3
N$20
  Top 0.406: R_GAIN3_0.1%.2 128.48,55.29 JP1.5
N$21
  Top 0.406: JP1.1 133.5,57.9 134.6,59 134.6,60.42 R_GAIN1_0.1%.2
PS0  (via drill 0.6 pad 0.25)
  Top 0.254: U1.47 79.49,57.49 78.2,56.2 74.6,56.2 v73.8,55.4 | v71.2,65.4 71.2,72.8 73.4,75 PCB1.11
  Bottom 0.254: v73.8,55.4 73.8,58.8 75,60 75,63.6 73.4,65.2 71.4,65.2 v71.2,65.4
PS1  (via drill 0.6 pad 0.25)
  Top 0.305: U1.48 80.41,57.01 78.6,55.2 75.6,55.2 74.4,54 72.8,54 69.4,57.4 v66.4,57.4 | v66.6,60.6 68.2,62.2 68.2,73.6 69.8,75.2 v70.6,75.2
  VDD 0.305: v66.4,57.4 66.4,60.4 v66.6,60.6
  GND 0.305: v70.6,75.2 73.68,75.2 PCB1.10
REFCLK
  Top 0.254: CLK.TP 75.97,44.77 75.4,44.2
  Top 0.305: U1.9 85.83,54.56 87.7,52.7 90.3,52.7 90.8,52.2 90.8,46 89,44.2 75.4,44.2 75.2,44.2 70.4,49 70.4,52.2 69.39,53.21 U2.5
RESET  (via drill 0.6 pad 0.25)
  Top 0.254: PCB1.12 70.87,78.47 71.6,79.2 81.8,79.2 82.6,78.4 82.6,72.4 v81.4,71.2 | v80,64.4 81.31,64.4 U1.36
  VDD 0.254: v81.4,71.2 81.4,65.8 v80,64.4
SCLK  (via drill 0.6 pad 0.25)
  Top 0.254: U1.40 79.41,60.99 78.2,62.2 73.6,62.2 v72,63.8
  Top 0.305: PCB1.SCK 102.87,54.47 101,52.6 101,49.17 SCLK.TP
  VDD 0.254: PCB1.SCK 100.01,54.61 96,50.6 73.4,50.6 | 72,59.4 v72,63.8
  VDD 0.305: 72,59.4 72,54.6 71,53.6 71,51.4 71.4,51 73,51 73.4,50.6
SDIO  (via drill 0.6 pad 0.25)
  Top 0.254: U1.41 79.09,60.51 78,61.6 70.5,61.6 70.4,61.5 v70.4,61.4
  Top 0.305: SDIO.TP 104.7,60.7 107.2,58.2 107.2,56.4 PCB1.MOSI
  VDD 0.254: PCB1.MOSI 105.41,54.39 107.6,52.2 107.6,51 106.4,49.8 70.4,49.8 v70.4,61.4
SDO  (via drill 0.6 pad 0.25)
  Top 0.254: U1.38 79.59,62.01 77.4,64.2 v76.8,64.2
  Top 0.305: SDO.TP 102.37,57.65 PCB1.MISO
  VDD 0.254: PCB1.MISO 101.15,57.15 95.6,51.6 81.4,51.6 76.8,56.2 v76.8,64.2
VBAT+
  Top 1.27: S3.6 103.46,30.34 100.2,33.6 96.96,33.6 JP2.1
VBAT-
  Top 1.27: JP3.2 118.28,33.88 114.8,30.4 112.75,30.4 S3.3
VIN_NEG  (via drill 0.6)
  Top 0.305: OP1.4 114.81,57.99 C36.2 112.92,57.97 C37.2
  Top 0.406: C37.2 110.75,55.65 v110.8,55.6
  Bottom 0.406: v110.8,55.6 110.8,54.6 110.6,54.4
  pour Bottom: 110.2,83 140.4,82.2 140.4,81.2 140.2,81.2 140.2,25.6 108.4,25.6 105.8,25.4 105.2,81.8 107.8,82.4 108.4,82.8 109.4,83
VIN_POS  (via drill 0.6, 0.6 pad 0.25)
  Top 0.305: C35.2 120.93,51.7 C31.2
  Top 0.406: IC2.3 | v121,53.6 120.91,53.51 C31.2 119.73,51.68 OP1.8 | C6.1 68.17,39.56 67.8,39.19 | IC1.3 64.52,69.77 C4.1 | U4.8 130.25,30.35 v130.6,30
  Top 0.813: 78.4,39.2 79,39.2 | 79,39.2 109.4,39.2 110,38.6 110,35.27 S3.5 | IC1.3 63.59,67.41 61,70 56.2,70 54.4,68.2 54.4,51.4 65,40.8 65,39.32 IC2.3 67.8,39.19 78.99,39.19 79,39.2
  VDD 0.406: v121,53.6 121,54.4 | v130.6,30 130.6,28.6 130.4,28.4
  pour VDD: 142,81.6 142,26.8 137.6,22.4 117.6,19.6 105.4,19.8 105.4,83.4 107.6,83.6 139.6,83.4 141.2,81.8
~CS
  Top 0.254: PCB1.8 81.03,74.43 75.4,68.8 75.4,63.6 76.2,62.8 78.2,62.8 79.5,61.5 U1.39
~IOUT
  Top 0.305: U1.20 92.01,60.51 92.7,61.2 92.7,68.9 95,71.2 114.08,71.2 RX_DAC_1%.1
  Top 0.406: RX_DAC_1%.1 114.19,71.15 R1_DAC_1%.2 118.21,66.88 R2_DAC_1%.2

## Text on the board
tValues: Use .1% / resistors / in this / area | UCL AD9954 / Current Source / T. Dowrick / 17.7.17 | Set jumper for / output current: / 2k: 500uA / 5k: 200uA / 10k: 100uA | Flip switch up / for Arduino power / and down for / external battery | Ard | Bat